# EAGLE board owl analog (EAGLE 6.4)
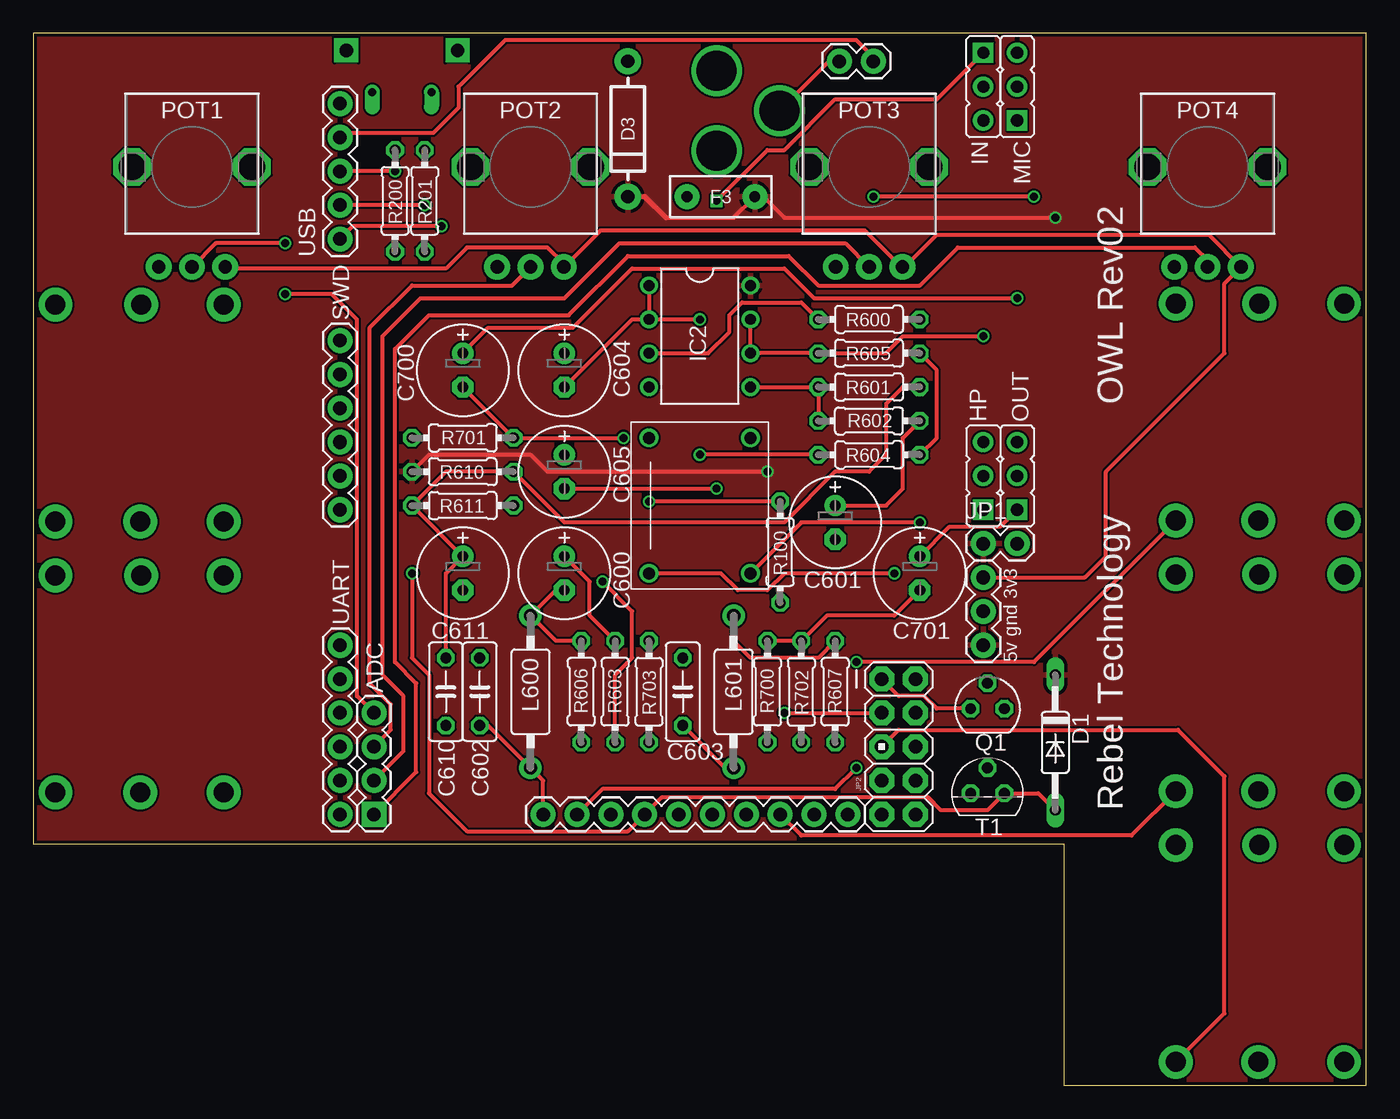
[diagram p0: board, top side]
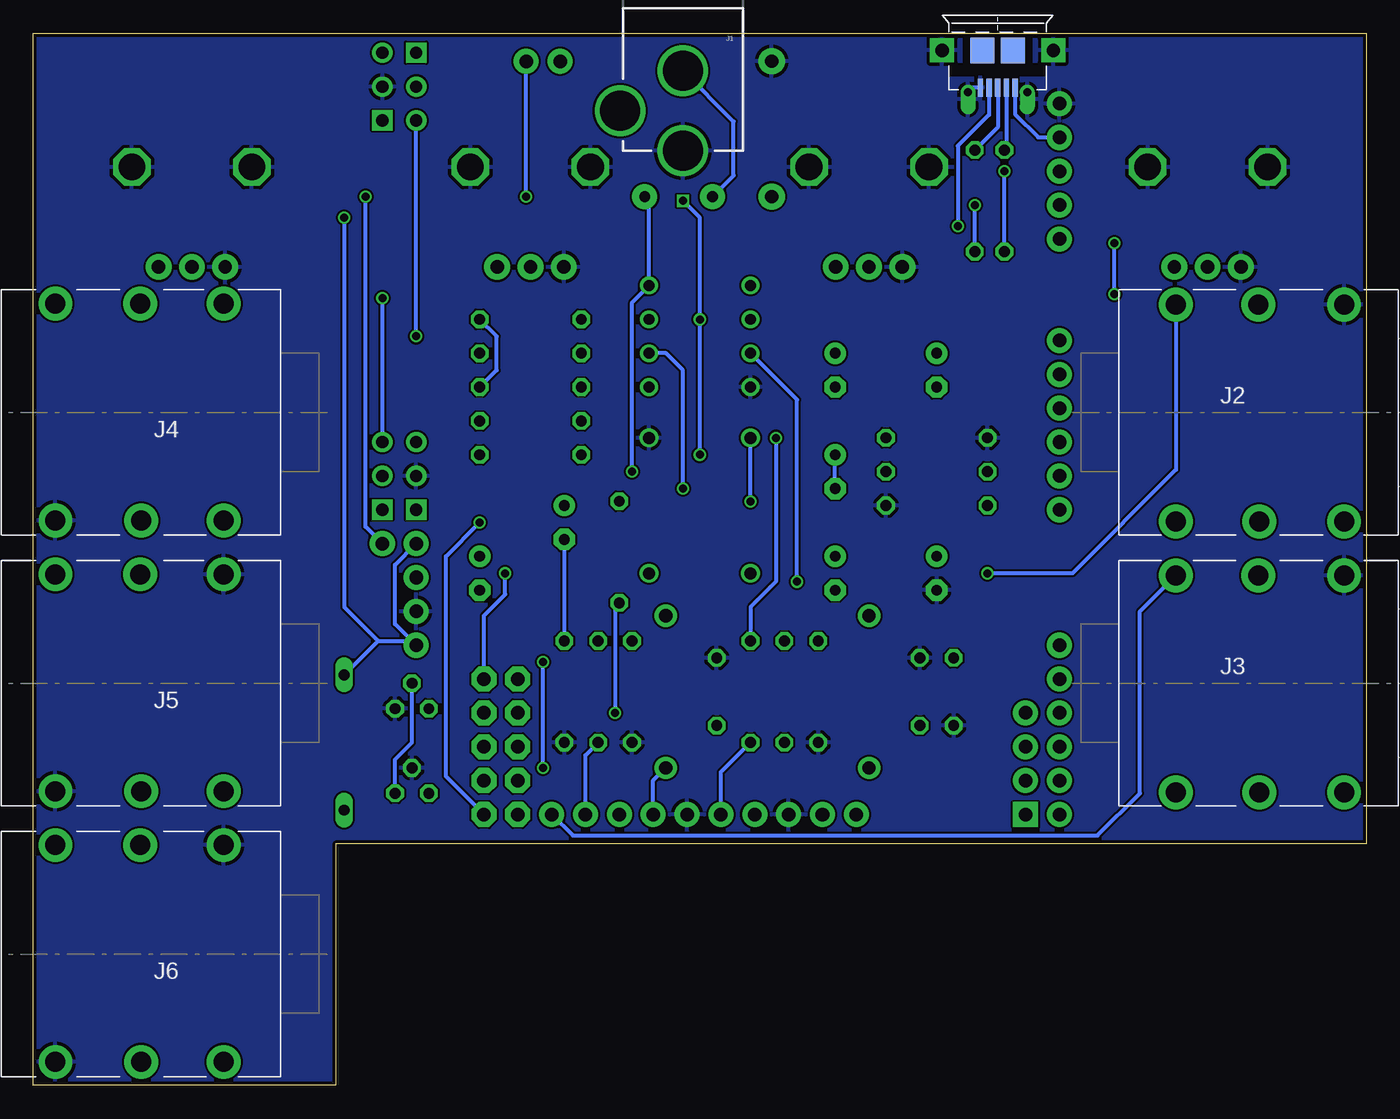
[diagram p1: board, bottom side, seen from below]

Size 100 x 78.93 mm. Coordinates in mm from the lower left corner, seen from the top.
Outline: 0,18.1 77.31,18.1 77.31,0 100,0 100,78.93 0,78.93 0,18.1
Copper layers (1*16): Top 0.035mm / dielectric 1.5mm / Bottom 0.035mm
Design rules "default *": minimum track width 6mil, minimum drill 12mil, track to track 6mil, track to pad 6mil, pad to pad 6mil, via to via 6mil, smd to smd 0mil, copper to edge 10mil, drill to drill 10mil, minimum pad ring 10mil, minimum via ring 6mil, stop-mask expansion 2mil, vias tented up to drill 100mil, thermal gap 10mil

## Footprints (pad centres in the part's own frame; a part is rotated, then mirrored left to right if it is on the bottom)
1X04 = drill 1.016 pad 1.88 square: 1 0,0 | drill 1.016 pad 1.88: 2 2.54,0; 3 5.08,0; 4 7.62,0
E2,5-7 = drill 0.813 pad 1.6: + -1.27,0 | drill 0.813 pad 1.6 octagon: - 1.27,0
C050-025X075 = drill 0.813 octagon: 1 -2.54,0; 2 2.54,0
DO35-10 = drill 0.813 long: A 5.08,0; C -5.08,0
DIODE-1N4001 = drill 1 pad 1.981: A -5.08,0; C 5.08,0
PTC = drill 0.8 pad 1.88: P$1 -2.54,0; P$2 2.54,0
JMP/3P/SIP = drill 0.914 pad 1.524 square: 1 -2.54,0 | drill 0.914 pad 1.524: 2 0,0; 3 2.54,0
DIL08 = drill 0.813 pad 1.27: 1 -3.81,-3.81; 2 -1.27,-3.81; 3 1.27,-3.81; 4 3.81,-3.81; 5 3.81,3.81; 6 1.27,3.81; 7 -1.27,3.81; 8 -3.81,3.81
POWER_JACK_PTH = drill 2.997: GND 0,7.7; GNDBREAK 4.7,10.7; PWR 0,13.7
NMJ6HCD2 = drill 1.5 pad 2.54: R -0.318,8.096; RN -0.238,-8.176; S 6.112,8.096; SN 6.112,-8.176; T -6.509,8.096; TN -6.509,-8.176
1X02 = drill 1.016 pad 1.88: 1 0,0; 2 2.54,0
AVR_ICSP = drill 1.016 pad 1.88 octagon: 1 -1.27,5.08; 2 1.27,5.08; 3 -1.27,2.54; 4 1.27,2.54; 5 -1.27,0; 6 1.27,0; 7 -1.27,-2.54; 8 1.27,-2.54; 9 -1.27,-5.08; 10 1.27,-5.08
1X10 = drill 1.016 pad 1.88: 1 0,0; 2 2.54,0; 3 5.08,0; 4 7.62,0; 5 10.16,0; 6 12.7,0; 7 15.24,0; 8 17.78,0; 9 20.32,0; 10 22.86,0
1X03 = drill 1.016 pad 1.88: 1 0,0; 2 2.54,0; 3 5.08,0
IRF-1 = drill 1 pad 1.676: 1 -5.715,0; 2 5.715,0
POT-ALPS-RK09L1140 = drill 1 pad 1.93: 1 -2.5,-7.5; 2 0,-7.5; 3 2.5,-7.5 | drill 2 octagon: P$5 -4.5,0; P$6 4.5,0
SOT54E = drill 0.813 octagon: D -1.27,0; G 0,1.905; S 1.27,0
0204/7 = drill 0.813 octagon: 1 -3.81,0; 2 3.81,0
1X06 = drill 1.016 pad 1.88: 1 0,0; 2 2.54,0; 3 5.08,0; 4 7.62,0; 5 10.16,0; 6 12.7,0
TO92 = drill 0.813 octagon: 1 1.27,0; 2 0,1.905; 3 -1.27,0
5GTH9 = drill 0.9: 1 5.08,3.81; 4 -5.08,-3.81; +3 5.08,-3.81; -2 -5.08,3.81
1X05 = drill 1.016 pad 1.88: 1 0,0; 2 2.54,0; 3 5.08,0; 4 7.62,0; 5 10.16,0
HRS_ZX62D-AB-5P8_USB = smd 0.4 x 1.35: 1 -1.3,2.91; 2 -0.65,2.91; 3 0,2.91; 4 0.65,2.91; 5 1.3,2.91 | smd 1.8 x 1.9: D_0 -1.15,0.11; D_1 1.15,0.11 | drill 1 pad 1.8 square: G -4.175,0.11; G2 4.175,0.11 | drill 0.6 pad 0.813 offset: G3 -2.225,3.235; G4 2.225,3.235

## Placement (x,y rotation side)
ADC  [1X04]  25.55,20.32 90 top
C600  0.1uF  [E2,5-7]  39.84,38.42 270 top
C601  0.1uF  [E2,5-7]  60.16,42.23 270 top
C602  47pF  [C050-025X075]  33.49,29.53 90 top
C603  47pF  [C050-025X075]  48.73,29.53 90 top
C604  0.1uF  [E2,5-7]  39.84,53.66 270 top
C605  0.1uF  [E2,5-7]  39.84,46.04 270 top
C610  100n  [C050-025X075]  30.95,29.53 270 top
C611  1uF  [E2,5-7]  32.22,38.42 270 top
C700  10u  [E2,5-7]  32.22,53.66 270 top
C701  10u  [E2,5-7]  66.51,38.42 270 top
D1  1N4148DO35-10  [DO35-10]  76.67,25.72 270 top
D3  [DIODE-1N4001]  44.6,71.75 270 top
F3  PTCPTH  [PTC]  51.59,66.67 0 top
HP  [JMP/3P/SIP]  71.27,45.72 90 top
IC2  TL072P  [DIL08]  50,56.2 270 top
IN  [JMP/3P/SIP]  71.27,74.93 270 top
J1  [POWER_JACK_PTH]  51.27,83.82 180 bottom
J2  NEUTRIK_NMJ6HCD2  [NMJ6HCD2]  7.77,50.48 0 bottom
J3  NEUTRIK_NMJ6HCD2  [NMJ6HCD2]  7.77,30.16 0 bottom
J4  NEUTRIK_NMJ6HCD2  [NMJ6HCD2]  92.23,50.48 180 bottom
J5  NEUTRIK_NMJ6HCD2  [NMJ6HCD2]  92.23,30.16 180 bottom
J6  NEUTRIK_NMJ6HCD2  [NMJ6HCD2]  92.23,9.84 180 bottom
JP1  [1X02]  71.27,40.64 0 top
JP2  M05X2PTH  [AVR_ICSP]  64.92,25.4 0 top
JP3  M10"  [1X10]  61.11,20.32 180 top
JP9  [1X02]  60.48,76.83 0 top
JP22  [1X03]  71.27,33.02 90 top
L600  [IRF-1]  37.3,29.53 270 top
L601  [IRF-1]  52.54,29.53 270 top
MIC  [JMP/3P/SIP]  73.81,74.93 90 top
OUT  [JMP/3P/SIP]  73.81,45.72 90 top
POT1  POT-ALPS-RK09L1140  [POT-ALPS-RK09L1140]  11.9,68.9 0 top
POT2  POT-ALPS-RK09L1140  [POT-ALPS-RK09L1140]  37.3,68.9 0 top
POT3  POT-ALPS-RK09L1140  [POT-ALPS-RK09L1140]  62.7,68.9 0 top
POT4  POT-ALPS-RK09L1140  [POT-ALPS-RK09L1140]  88.1,68.9 0 top
Q1  BS170  [SOT54E]  71.59,28.26 0 top
R100  1k  [0204/7]  56.03,40.01 270 top
R200  22R  [0204/7]  27.14,66.36 270 top
R201  22R  [0204/7]  29.36,66.36 270 top
R600  2M  [0204/7]  62.7,57.47 180 top
R601  2M  [0204/7]  62.7,52.39 180 top
R602  1K  [0204/7]  62.7,49.85 0 top
R603  1K  [0204/7]  43.65,29.53 90 top
R604  1M  [0204/7]  62.7,47.31 180 top
R605  1M  [0204/7]  62.7,54.93 180 top
R606  2M  [0204/7]  41.11,29.53 90 top
R607  2M  [0204/7]  60.16,29.53 90 top
R610  47k  [0204/7]  32.22,46.04 180 top
R611  47k  [0204/7]  32.22,43.5 180 top
R700  47k  [0204/7]  55.08,29.53 90 top
R701  47k  [0204/7]  32.22,48.58 0 top
R702  100R  [0204/7]  57.62,29.53 270 top
R703  100R  [0204/7]  46.19,29.53 270 top
SWD  [1X06]  23.01,55.88 270 top
T1  2N3904  [TO92]  71.59,21.91 0 top
U$1  5GTH9  [5GTH9]  50,43.5 90 top
UART  [1X06]  23.01,20.32 90 top
USB  [1X05]  23.01,63.5 90 top
USB1  [HRS_ZX62D-AB-5P8_USB]  27.65,77.77 180 bottom

## Library data of the parts
ADC J1 JP1-JP3 JP9 JP22 SWD UART USB = SparkFun
C600-C605 C610 C611 C700 C701 L600 L601 = rcl
D1 = diode
D3 F3 POT1-POT4 R100 R200 R201 R600-R607 R610 R611 R700-R703 = Rebel
HP IN MIC OUT = audioint
IC2 = linear
J2-J6 = neutrik_jacks
Q1 = transistor-small-signal
T1 = transistor
U$1 = SWITCH-5GTH9
USB1 = USB_connector

## Nets
+3V3: JP22.3 POT1.3 POT2.3 POT3.3 POT4.3
+5V: D1.C D3.C F3.P$2 IC2.8 JP1.1 JP22.1 R610.2
ADC1: ADC.4 POT1.2
ADC2: ADC.3 POT2.2
ADC3: ADC.2 POT3.2
ADC4: ADC.1 POT4.2
FX_IN_L: C602.1 JP3.10 L600.2
FX_IN_R: C603.1 JP3.4 L601.2
FX_OUT_L: JP3.6 R703.2
FX_OUT_R: JP3.2 R702.2
GND: C602.2 C603.2 C610.2 C611.- D3.A HP.2 IC2.4 J1.PWR J2.S J3.S J4.S J5.S J5.TN J6.S J6.TN JP3.5 JP3.8 JP22.2 MIC.2 POT1.1 POT1.P$5 POT1.P$6 POT2.1 POT2.P$5 POT2.P$6 POT3.1 POT3.P$5 POT3.P$6 POT4.1 POT4.P$5 POT4.P$6 Q1.S R606.1 R607.1 R611.1 R700.1 R701.1 T1.2 U$1.+3 USB1.5 USB1.G USB1.G2 USB1.G3 USB1.G4 USB.5
IN_L: J4.T JP3.9
IN_R: J5.T JP3.3
L_IN: C604.- IC2.1 IC2.2 IN.1 R604.2
L_OUT: C700.+ OUT.3
N$1: R201.1 USB1.3
N$2: C600.- L600.1 R606.2
N$3: C601.- L601.1 R607.2
N$4: F3.P$1 J1.GND
N$5: J1.GNDBREAK JP9.1
N$6: R200.1 USB1.2
N$7: C600.+ R603.2
N$8: HP.3
N$9: C601.+ R602.2
N$10: R100.1 U$1.1
N$18: C610.1 C611.+ R600.1 R601.1 R610.1 R611.2
N$33: C701.- R700.2 R702.1
N$36: C700.- R701.2 R703.1
N$37: IC2.3 R600.2 R603.1
N$38: IC2.5 R601.2 R602.1
N$43: MIC.1
N$44: HP.1
OUT_L: D1.A J2.T JP3.7 Q1.G T1.1
OUT_R: J3.T JP3.1
PA3: JP2.10 U$1.4
PA4: JP2.9
PA5: JP2.8
PA6: JP2.7
PA7: JP2.6
PB0: JP2.3 R100.2
PB1: JP2.2 U$1.-2
PB2: JP2.1 Q1.D
PC4: J6.T JP2.5
PC5: JP2.4
R_IN: C605.+ C605.- IC2.6 IC2.7 IN.3 R605.2
R_OUT: C701.+ OUT.1
USB_DM: R200.2 USB.3
USB_DP: R201.2 USB.2
USB_ID: USB1.4 USB.1
USB_VBUS: JP1.2 JP9.2 USB1.1 USB.4
VCC/2: R604.1 R605.1

## Tracks (layer width: path | path; a pad name or v marks a point on that pad's centre or on a via)
+3V3
  Top 0.305: JP22.3 78.89,38.1 80.48,39.69 80.48,46.04 89.37,54.93 89.37,60.17 POT4.3 88.18,63.82 67.78,63.82 65.36,61.4 POT3.3 65.12,61.4 62.38,64.14 42.54,64.14 POT2.3 39.8,61.63 38.57,62.87 32.54,62.87 30.95,61.28 14.52,61.28 POT1.3
+5V  (via drill 0.6)
  Top 0.305: D3.C 45.87,66.67 | 47.46,65.09 52.54,65.09 F3.P$2 | 54.76,66.67 56.35,65.09 v76.67,65.09 | R610.2 29.68,47.31 37.3,47.31 38.57,46.04 v55.08,46.04
  Top 0.406: 45.87,66.67 47.46,65.09 | F3.P$2 54.76,66.67
  Bottom 0.305: v76.67,65.09 76.67,35.88 74.13,33.34 | D1.C 74.13,33.34 | 74.13,33.34 71.59,33.34 JP22.1 72.86,34.61 72.86,39.05 JP1.1 | F3.P$2 53.81,66.36 IC2.8 55.08,58.74 v55.08,46.04
  pour Top: -1.44,79.69 -1.44,17.46 76.67,17.46 76.67,-1.59 100.17,-1.59 100.17,79.69
ADC1  (via drill 0.6)
  Top 0.305: ADC.4 24.28,29.21 24.28,57.47 22.38,59.37 v18.88,59.37 | v18.88,63.18 13.68,63.18 POT1.2
  Bottom 0.305: v18.88,59.37 v18.88,63.18
ADC2
  Top 0.305: ADC.3 26.82,26.67 26.82,28.57 25.23,30.16 25.23,56.83 28.41,60.01 35.91,60.01 POT2.2
ADC3
  Top 0.305: ADC.2 27.77,25.08 27.77,29.21 26.19,30.8 26.19,56.2 29.04,59.06 39.84,59.06 43.97,63.18 60.92,63.18 POT3.2
ADC4
  Top 0.305: ADC.1 28.73,23.5 28.73,30.16 27.14,31.75 27.14,55.24 29.68,57.78 40.16,57.78 44.6,62.23 56.67,62.23 58.89,60.01 66.51,60.01 69.37,62.87 87.15,62.87 88.1,61.91 POT4.2
FX_IN_L
  Top 0.305: JP3.10 38.25,22.86 L600.2 34.12,26.99 C602.1
FX_IN_R
  Top 0.305: L601.2 51.91,23.81 C603.1
  Bottom 0.305: JP3.4 53.49,22.86 L601.2
FX_OUT_L
  Bottom 0.305: JP3.6 48.41,23.5 R703.2
FX_OUT_R
  Bottom 0.305: JP3.2 58.57,24.77 R702.2
GND
  Bottom 0.305: USB1.5 29.55,74.86 USB1.G4
  pour Bottom: -1.44,17.46 -1.44,79.69 100.17,79.69 100.17,-1.59 76.67,-1.59 76.67,17.46
IN_L  (via drill 0.6)
  Top 0.305: J4.T 75.08,31.75 v61.75,31.75 | JP3.9 42.7,22.22 60.16,22.22 v61.75,23.81
  Bottom 0.305: v61.75,23.81 v61.75,31.75
IN_R
  Top 0.305: J5.T 82.39,18.73 57.62,18.73 JP3.3
L_IN  (via drill 0.6)
  Top 0.305: IC2.1 IC2.2 | IC2.2 44.92,57.47 C604.- | R604.2 v50,47.31 | v50,57.47 IC2.2 | v51.27,66.36 55.08,70.17 56.35,70.17 60.16,73.98 67.78,73.98 IN.1
  Bottom 0.305: v50,47.31 v50,57.47 50,65.09 v51.27,66.36
L_OUT  (via drill 0.6)
  Top 0.305: C700.+ 34.12,56.83 40.48,56.83 44.92,61.28 56.35,61.28 58.57,59.06 v73.81,59.06
  Bottom 0.305: OUT.3 v73.81,59.06
N$1
  Bottom 0.305: USB1.3 27.65,71.88 R201.1
N$2
  Top 0.305: R606.2 39.21,33.34 L600.1 39.21,37.15 C600.-
N$3
  Top 0.305: R607.2 58.89,32.07 53.81,32.07 52.54,33.34 L601.1
  Bottom 0.305: R607.2 C601.-
N$4
  Bottom 0.305: F3.P$1 47.46,68.26 47.46,72.31 J1.GND
N$5
  Top 0.305: JP9.1 59.69,76.83 J1.GNDBREAK
N$6
  Bottom 0.305: USB1.2 27,70.31 R200.1
N$7
  Top 0.305: R603.2 41.75,35.24 41.75,37.78 C600.+
N$9
  Top 0.305: C601.+ 63.97,43.5 65.24,44.77 65.24,48.58 R602.2
N$10  (via drill 0.6)
  Top 0.305: R100.1 v46.19,43.81
  Bottom 0.305: v46.19,43.81 U$1.1
N$18
  Top 0.305: C610.1 30.95,38.42 C611.+ R611.2 30.95,46.04 R610.1 39.84,42.23 56.35,42.23 60.16,46.04 62.7,46.04 63.97,47.31 63.97,51.12 65.24,52.39 R601.1
  Bottom 0.305: R601.1 65.24,53.66 65.24,56.2 R600.1
N$33
  Top 0.305: R700.2 R702.1 59.53,35.24 64.61,35.24 C701.-
N$36  (via drill 0.6)
  Top 0.305: C700.- R701.2 v44.29,48.58
  Bottom 0.305: v44.29,48.58 44.29,37.78 46.19,35.88 R703.1
N$37  (via drill 0.6)
  Top 0.305: R603.1 43.65,30.8 44.92,32.07 44.92,35.56 v42.7,37.78 | IC2.3 50.64,54.93 52.22,56.52 52.22,57.78 53.18,58.74 57.62,58.74 R600.2
  Bottom 0.305: v42.7,37.78 42.7,51.44 IC2.3
N$38
  Top 0.305: IC2.5 R601.2 R602.1
OUT_L  (via drill 0.6)
  Top 0.305: D1.A 75.4,21.91 T1.1 71.59,20.64 68.1,20.64 67.14,21.59 47.14,21.59 JP3.7 44.6,19.05 32.54,19.05 29.68,21.91 29.68,30.8 28.41,32.07 v28.41,38.42
  Bottom 0.305: T1.1 72.86,24.45 71.59,25.72 Q1.G | J2.T 14.28,46.2 22.06,38.42 v28.41,38.42
OUT_R
  Bottom 0.305: JP3.1 59.53,18.73 20.15,18.73 16.98,21.91 16.98,35.56 J3.T
PA3  (via drill 0.6)
  Top 0.305: v66.51,42.23 57.62,42.23 U$1.4
  Bottom 0.305: JP2.10 69.05,23.18 69.05,39.69 v66.51,42.23
PB0  (via drill 0.6)
  Top 0.305: v56.35,27.94 JP2.3
  Bottom 0.305: R100.2 56.35,35.88 v56.35,27.94
PB1  (via drill 0.6)
  Top 0.305: U$1.-2 51.59,38.42 52.86,37.15 55.08,37.15 56.35,38.42 v64.61,38.42
  Bottom 0.305: JP2.2 66.19,35.24 64.61,36.83 v64.61,38.42
PB2
  Top 0.305: Q1.D 67.78,28.26 66.83,29.21 64.92,29.21 JP2.1
PC4
  Top 0.305: J6.T 89.37,5.4 89.37,23.18 85.88,26.67 64.92,26.67 JP2.5
R_IN  (via drill 0.6)
  Top 0.305: IC2.7 IC2.6 R605.2 63.97,54.93 65.24,56.2 v71.27,56.2 | C605.- v51.27,44.77
  Bottom 0.305: v51.27,44.77 51.27,53.66 52.54,54.93 IC2.6 | v71.27,56.2 IN.3 | C605.- C605.+
R_OUT
  Top 0.305: C701.+ 68.73,41.91 72.54,41.91 OUT.1
USB_DM  (via drill 0.6)
  Top 0.305: v27.14,68.58 USB.3
  Bottom 0.305: R200.2 v27.14,68.58
USB_DP  (via drill 0.6)
  Top 0.305: v29.36,66.04 USB.2
  Bottom 0.305: R201.2 v29.36,66.04
USB_ID  (via drill 0.6)
  Top 0.305: v30.63,64.45 23.96,64.45 USB.1
  Bottom 0.305: USB1.4 28.3,72.82 30.63,70.49 v30.63,64.45
USB_VBUS  (via drill 0.6)
  Top 0.305: USB.4 23.33,71.44 30,71.44 31.9,73.34 31.9,74.93 35.4,78.42 61.75,78.42 63.02,77.15 JP9.2 | v75.08,66.67 v63.02,66.67
  Bottom 0.305: USB1.1 26.35,72.87 24.6,71.12 USB.4 | JP1.2 75.08,41.91 v75.08,66.67 | v63.02,66.67 JP9.2
VCC/2
  Top 0.305: R604.1 67.78,48.58 67.78,53.66 R605.1

## Text on the board
tPlace: OWL Rev02 | 3v3 | gnd | 5v | Rebel Technology